# Altium PCB LCD_KB_Controller.PcbDoc (part 2 of 2)
Units mm, origin at the board's own origin, x right, y up, seen from the top; angles counter-clockwise.
Board outline 65 x 95 mm, 2 copper layers (Top Layer, Bottom Layer); 145 components, 109 nets, 476 pads, 326 vias.
Unrouted connection lines stored in the file: 275.
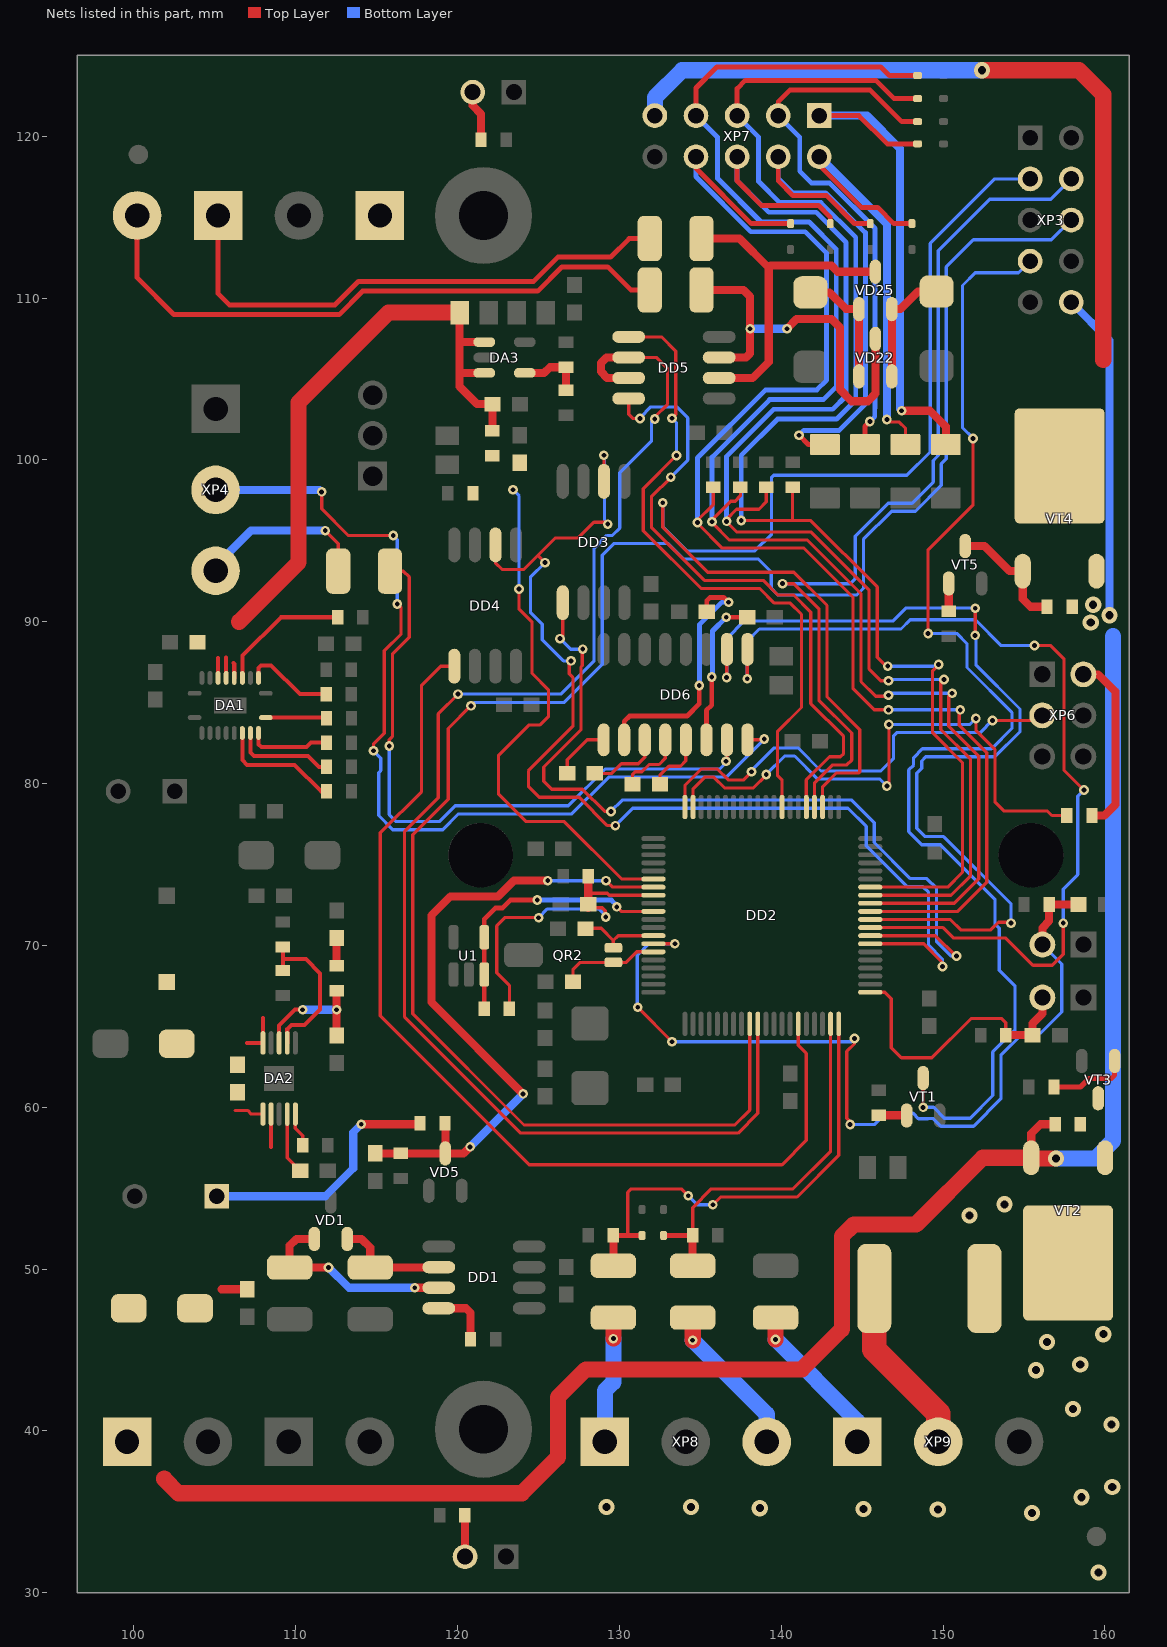
[diagram p2: the nets of this part, all layers, seen from the top]

## Via types
v1: diameter 0.6, hole 0.3, Top Layer to Bottom Layer, 301 vias
v2: diameter 1, hole 0.5, Top Layer to Bottom Layer, 25 vias

## Nets (pads, with @x,y where several pads share a name; then routed paths per layer and width w, separated by ;. In a path a pad name is that pad's centre, name@x,y a point inside that pad or via, vN(x,y) a via of type N, cw(c..) or ccw(c..) an arc to the next point about the centre after c; other vN are vias at no path point) (continued)
NetC11_2: C11.2 DD2.14 J2.2 R26.2 | length 54.5
  Top Layer w0.2: v1(131.131,66.178) 131.125,66.172 v1(133.25,64.047) ; DD2.14@132.1,70.1 v1(133.425,70.1) ; v1(144.257,58.928) 144.257,59.118 144.05,59.325 144.05,63.45 144.525,63.925 v1(144.525,64.25)
  Top Layer w0.5: J2.2@156.135,70.05 156.135,71.085 156.549,71.499 R26.2@156.549,72.525 C11.2@158.375,72.525
  Bottom Layer w0.2: v1(131.131,66.178) 131.1,66.21 131.1,69.375 131.825,70.1 v1(133.425,70.1) ; v1(133.25,64.047) 144.322,64.047 v1(144.525,64.25) ; v1(144.257,58.928) 145.749,58.928 146.446,59.625 148.142,59.625 148.476,59.291 149.056,59.291 149.065,59.3 149.393,59.3 149.868,58.825 151.882,58.825 153.575,60.518 153.575,63.211 154.95,64.586 156.036,64.586 157.335,65.885 157.335,68.85 J2.2@156.135,70.05
NetC20_2: C20.2 DD2.8 L1.2 R37.1 | length 20.3
  Top Layer w0.2: R37.1@123.2,66.075 123.2,67.525 122.425,68.3 122.425,71.2 122.95,71.725 124.985,71.725 v1(125.006,71.703) ; C20.2@128.075,72.325 128.95,72.325 129.125,72.15 129.125,71.785 v1(129.156,71.754) ; 128.075,73.275 128.125,73.225 129.25,73.225 129.375,73.1 DD2.8@132.1,73.1
  Top Layer w0.5: C20.2@128.075,72.325 C20.2@128.075,72.55 128.075,73.275 L1.2@128.075,74.099
  Bottom Layer w0.2: v1(125.006,71.703) 125.553,72.25 128.725,72.25 129.156,71.819 v1(129.156,71.754)
NetC23_1: C23.1 DA2.10 L2.1 VD21.2 | length 2.5
  Top Layer w0.25: 107,63.975 DA2.10@107.975,63.975 107.975,65.525
NetC23_2: C23.2 DA2.1 | length 1.8
  Top Layer w0.2: 106.25,59.8 107.025,59.8 107.25,59.575 DA2.1@107.975,59.575
NetC28_1: C28.1 DA2.4 | length 3.8
  Top Layer w0.2: DA2.4@109.475,59.575 109.475,56.875 C28.1@110.275,56.075
NetC29_1: C29.1 DA2.8 R31.2 | length 7.8
  Top Layer w0.25: DA2.8@108.975,63.975 108.975,65.05 109.95,66.025 v1(110.425,66.025)
  Top Layer w0.5: C29.1@112.525,64.425 v1(112.525,66.025) R31.2@112.525,67.201
  Bottom Layer w0.5: v1(110.425,66.025) v1(112.525,66.025)
NetC30_1: C30.1 R31.1 | length 1.7
  Top Layer w0.5: R31.1@112.525,68.75 C30.1@112.525,70.45
NetC36_1: C36.1 DD6.3 | length 4.6
  Top Layer w0.2: C36.1@128.475,80.625 129.525,80.625 130.125,81.225 131.175,81.225 131.565,81.615 DD6.3@131.565,82.7
NetC36_2: C36.2 DD6.1 | length 3.6
  Top Layer w0.2: C36.2@126.775,80.625 126.775,81.475 128,82.7 DD6.1@129.025,82.7
NetC37_2: C37.2 DD6.2 | length 15.7
  Top Layer w0.3: DD6.2@130.295,82.7 130.295,83.845 130.625,84.175 134.184,84.175 134.932,84.923 v1(134.932,86.054) ; C37.2@135.4,90.625 135.4,91.3 135.6,91.5 136.45,91.5 v1(136.75,91.2)
  Bottom Layer w0.3: v1(134.932,86.054) 134.957,86.079 134.957,89.832 136.325,91.2 v1(136.75,91.2)
NetC38_2: C38.2 DD6.6 | length 9.5
  Top Layer w0.3: DD6.6@135.375,82.7 135.375,84.517 135.707,84.849 v1(135.707,86.579) v1@135.786,86.5 ; v1(136.6,90.275) C38.2@137.9,90.275
  Bottom Layer w0.3: v1(135.707,86.579) 135.75,86.623 135.75,89.425 v1(136.6,90.275)
NetC39_1: C39.1 DD6.5 | length 3.8
  Top Layer w0.2: C39.1@132.5,79.95 132.5,80.518 133.057,81.075 133.775,81.075 134.105,81.405 DD6.5@134.105,82.7
NetC39_2: C39.2 DD6.4 | length 4.2
  Top Layer w0.2: C39.2@130.8,79.95 130.8,80.55 130.975,80.725 131.382,80.725 131.832,81.175 132.45,81.175 132.835,81.56 DD6.4@132.835,82.7
NetC40_2: C40.2 DD2.13 QR2.2 | length 5.1
  Top Layer w0.2: C40.2@127.85,71.075 127.871,71.054 128.871,71.054 129.625,70.3 ; QR2.2@129.625,69.85 129.625,70.3 ; DD2.13@132.1,70.6 129.925,70.6 129.625,70.3
NetC41_2: C41.2 DD2.15 QR2.1 | length 6.2
  Top Layer w0.2: C41.2@127.125,67.75 127.125,68.5 127.575,68.95 QR2.1@129.625,68.95 130.425,68.95 131.075,69.6 DD2.15@132.1,69.6
NetDA1_7: DA1.7 R2.1 | length 7.7
  Top Layer w0.25: DA1.7@106.7,83.125 106.7,81.45 107,81.15 109.925,81.15 111.55,79.525 R2.1@111.9,79.525
NetDA1_8: DA1.8 R5.1 | length 6.3
  Top Layer w0.25: DA1.8@107.2,83.125 107.2,81.925 107.425,81.7 110.75,81.7 111.425,81.025 R5.1@111.9,81.025
NetDA1_9: DA1.9 R3.1 | length 5.1
  Top Layer w0.25: DA1.9@107.7,83.125 107.7,82.425 107.875,82.25 110.675,82.25 110.95,82.525 R3.1@111.9,82.525
NetDA1_10: DA1.10 R6.1 | length 3.7
  Top Layer w0.25: DA1.10@108.15,84.075 R6.1@111.85,84.075
NetDA1_12: DA1.12 R4.1 | length 5.6
  Top Layer w0.25: DA1.12@107.7,86.525 107.7,87.15 107.85,87.3 108.475,87.3 110.25,85.525 R4.1@111.875,85.525
NetDA1_14: DA1.14 R1.1 | length 8.3
  Top Layer w0.25: DA1.14@106.7,86.525 106.7,87.9 109.075,90.275 R1.1@112.6,90.275
NetDA2_5: DA2.5 R32.2 | length 2.1
  Top Layer w0.2: DA2.5@109.975,59.575 109.975,58.7 110.426,58.249 R32.2@110.426,57.65
NetDA2_7: DA2.7 R30.1 R33.2 | length 9.7
  Top Layer w0.25: R33.2@109.2,68.449 109.2,69.15 ; R30.1@109.2,69.9 109.2,69.15 ; DA2.7@109.475,63.975 109.475,64.825 109.725,65.075 110.55,65.075 111.5,66.025 111.5,68.275 110.625,69.15 109.2,69.15
NetDA3_4: DA3.4 R34.1 R35.2 | length 4.1
  Top Layer w0.5: DA3.4@124.15,105.375 125.35,105.375 125.7,105.725 R34.1@126.7,105.725 R35.2@126.7,104.299
NetDD1_6: DD1.6 FU2.1 VD1.2 | length 7.1
  Top Layer w0.5: VD1.2@113.182,51.863 114.062,51.863 114.6,51.325 FU2.1@114.6,50.1 118.822,50.1 DD1.6@118.837,50.115
NetDD1_7: DD1.7 FU1.1 VD1.1 | length 12.8
  Top Layer w0.5: VD1.1@111.15,51.863 110.038,51.863 109.625,51.45 FU1.1@109.625,50.1 v1(112.025,50.1) ; v1(117.355,48.845) DD1.7@118.837,48.845
  Bottom Layer w0.5: v1(112.025,50.1) 113.28,48.845 v1(117.355,48.845)
NetDD1_8: DD1.8 R8.1 | length 3.7
  Top Layer w0.5: DD1.8@118.837,47.575 120.525,47.575 120.8,47.3 R8.1@120.8,45.675
NetDD2_10: DD2.10 R37.2 U1.3 U1.4 | length 16.8
  Top Layer w0.2: v1(129.831,72.379) 130.11,72.1 DD2.10@132.1,72.1
  Top Layer w0.3: R37.2@121.651,66.075 U1.3@121.65,68.2 U1.4@121.65,70.5 121.65,71.625 122.325,72.3 122.765,72.3 123.265,72.8 v1(124.925,72.8)
  Bottom Layer w0.3: v1(124.925,72.8) 129.5,72.8 129.831,72.469 v1(129.831,72.379)
NetDD5_6: DD5.6 FU9.1 VD25.3 | length 21
  Top Layer w0.5: FU9.1@135.075,113.675 137.425,113.675 139.225,111.875 ; DD5.6@136.163,105.06 138.235,105.06 139.225,106.05 139.225,111.875 ; VD25.3@145.816,111.624 143.476,111.624 143.1,112 139.35,112 139.225,111.875
NetDD5_7: DD5.7 FU8.1 VD22.3 | length 24.6
  Top Layer w0.5: FU8.1@135.075,110.5 137.675,110.5 138.075,110.1 v1(138.075,108.1) 138.075,106.575 137.83,106.33 ; DD5.7@136.163,106.33 137.775,106.33 ; v1(140.35,108.1) 140.95,108.7 143.1,108.7 143.625,108.175 143.625,104.35 144.35,103.625 145.35,103.625 145.816,104.091 VD22.3@145.816,107.474
  Bottom Layer w0.5: v1(138.075,108.1) v1(140.35,108.1)
NetFU3_1: FU3.1 XP9.1 | length 9.8
  Top Layer w1: v1(139.65,45.65) FU3.1@139.65,47
  Bottom Layer w1: v1(139.65,45.65) 144.7,40.6 XP9.1@144.7,39.325
NetFU4_1: FU4.1 XP8.3 | length 9.6
  Top Layer w1: v1(134.525,45.6) FU4.1@134.525,47
  Bottom Layer w1: v1(134.525,45.6) 139.1,41.025 XP8.3@139.1,39.325
NetFU5_1: FU5.1 XP8.1 | length 7.9
  Top Layer w1: v1(129.625,45.7) FU5.1@129.625,47
  Bottom Layer w1: XP8.1@129.1,39.325 129.1,42.475 129.625,43 v1(129.625,45.7)
NetFU6_2: FU6.2 XP4.3 | length 10.8
  Top Layer w0.2: v1(111.825,95.625) 112.625,94.825 FU6.2@112.625,93.125
  Bottom Layer w0.5: XP4.3@105.05,93.15 105.05,93.45 107.225,95.625 v1(111.825,95.625)
NetFU7_1: FU7.1 XP9.2 | length 11.1
  Top Layer w1.5: FU7.1@145.75,48.8 145.75,45.025 149.7,41.075 XP9.2@149.7,39.325
NetFU7_2: FU7.2 VT2.2
  other v2: 159.6,31.25 155.5,34.925 149.675,35.15 145.075,35.175 138.675,35.225 129.2,35.3 134.425,35.3 158.55,35.9 160.45,36.525 160.4,40.4 158.025,41.35 155.75,43.75 158.475,44.1 156.425,45.5 159.9,45.975 151.625,53.3 153.8,54
NetFU8_2: FU8.2 XP5.2 | length 38.3
  Top Layer w0.3: XP5.2@100.2,115.1 100.2,111.25 102.475,108.975 112.675,108.975 114.125,110.425 124.95,110.425 126.45,111.925 129.275,111.925 130.7,110.5 FU8.2@131.875,110.5
NetFU9_2: FU9.2 XP5.1 | length 33.5
  Top Layer w0.3: XP5.1@105.2,115.1 105.2,110.275 105.9,109.575 112.426,109.575 113.876,111.025 124.701,111.025 126.201,112.525 129.45,112.525 130.6,113.675 FU9.2@131.875,113.675
NetR10_2: R10.2 XP6.2 | length 11.1
  Top Layer w0.5: XP6.2@158.665,86.75 159.575,86.75 160.65,85.675 160.65,78.7 159.975,78.025 R10.2@159.199,78.025
NetR11_2: R11.2 VT1.1 | length 1.7
  Top Layer w0.5: R11.2@146.025,59.501 147.737,59.501 VT1.1@147.75,59.488
NetR14_1: R14.1 VT2.1 VT3.3
NetR15_2: R15.2 VT3.1 | length 4.9
  Top Layer w0.3: R15.2@156.849,61.25 158.49,61.25 159.015,61.775 160.4,61.775 160.6,61.975 VT3.1@160.6,62.862
NetR20_1: R20.1 VT4.1 VT5.3 | length 7.6
  Top Layer w0.5: VT5.3@151.366,94.674 152.551,94.674 154.1,93.125 VT4.1@154.92,93.125 154.92,91.405 155.4,90.925 R20.1@156.425,90.925
NetR21_2: R21.2 VT5.1 | length 1.7
  Top Layer w0.5: R21.2@150.35,90.649 VT5.1@150.35,92.363
NetR28_2: R28.2 VD18.2 | length 2.5
  Top Layer w0.5: VD18.2@120.449,32.236 R28.2@120.449,34.775
NetR29_2: R29.2 VD19.2 | length 3.2
  Top Layer w0.5: VD19.2@120.935,122.725 120.935,121.89 121.451,121.374 R29.2@121.451,119.775
NetVD6_1: VD6.1 VD9.2 XP7.1 | length 33.1
  Top Layer w0.3: XP7.1@142.35,121.275 144.8,121.275 146.55,119.525 VD9.2@148.425,119.525
  Top Layer w0.5: v1(147.438,103.038) 149.187,103.038 150.175,102.05 VD6.1@150.175,100.951
  Bottom Layer w0.5: XP7.1@142.35,121.275 145.3,121.275 147.325,119.25 147.325,103.15 v1(147.438,103.038)
NetVD7_1: VD7.1 VD8.2 XP7.3 | length 34.3
  Top Layer w0.3: XP7.3@139.81,121.275 139.81,122.135 140.525,122.85 145.5,122.85 147.45,120.9 VD8.2@148.425,120.9 ; VD7.1@145.175,100.951 145.175,102.075 v1(145.475,102.375)
  Bottom Layer w0.3: XP7.3@139.81,121.275 141.138,119.947 141.138,117.837 141.875,117.1 142.995,117.1 145.8,114.295 145.8,103.2 145.775,103.175 145.775,102.675 v1(145.475,102.375)
NetVD10_1: VD10.1 VD12.2 XP7.2 | length 28.1
  Top Layer w0.2: v1(146.525,102.5) 146.688,102.338 147.287,102.338 147.675,101.95 VD10.1@147.675,100.951
  Top Layer w0.3: XP7.2@142.35,118.735 142.35,118.2 144.95,115.6 145.95,115.6 146.95,114.6 VD12.2@148.075,114.6
  Bottom Layer w0.5: XP7.2@142.35,118.735 146.525,114.56 v1(146.525,102.5)
NetVD11_1: VD11.1 VD13.2 XP7.4 | length 33.7
  Top Layer w0.3: XP7.4@139.81,118.735 139.81,117.24 140.725,116.325 142.8,116.325 144.525,114.6 VD13.2@145.5,114.6 ; v1(141.1,101.525) 141.674,100.951 VD11.1@142.7,100.951
  Bottom Layer w0.3: XP7.4@139.81,118.735 139.81,117.39 140.7,116.5 142.747,116.5 145.2,114.047 145.2,103.449 143.576,101.825 141.4,101.825 v1(141.1,101.525)
NetVD22_1: VD22.1 VD23.1 VD25.1 | length 7.6
  Top Layer w0.5: VD23.1@141.8,110.35 142.975,110.35 144.012,109.313 VD25.1@144.8,109.313 VD22.1@144.8,105.163
NetVD22_2: VD22.2 VD24.2 VD25.2 | length 7.4
  Top Layer w0.5: VD22.2@146.832,105.163 VD25.2@146.832,109.313 147.363,109.313 148.45,110.4 VD24.2@149.6,110.4
NetVT1_3: VT1.3 XP3.7 | length 75.5
  Top Layer w0.2: v1(148.766,59.991) VT1.3@148.766,61.799 ; v1(149.075,89.275) 149.075,94.456 151.85,97.231 v1(151.85,101.325)
  Bottom Layer w0.2: v1(148.766,59.991) 149.409,59.991 150.075,59.325 151.675,59.325 153.075,60.725 153.075,63.418 154.45,64.793 154.45,67.482 153.475,68.457 153.475,71.068 153.2,71.343 153.2,72.85 149.825,76.225 148.682,76.225 147.875,77.032 147.875,80.843 148.175,81.143 148.175,81.6 148.725,82.15 152.997,82.15 154.25,83.403 154.25,84.397 151.475,87.172 151.475,88.65 150.85,89.275 v1(149.075,89.275) ; v1(151.85,101.325) 151.2,101.975 151.2,110.775 151.989,111.564 154.659,111.564 XP3.7@155.375,112.28
NetVT4_2: VT4.2 XP7.9 | length 46.5
  Top Layer w1: v2(152.4,124.075) 158.4,124.075 159.9,122.575 159.9,106.175
  Bottom Layer w1: XP7.9@132.19,121.275 132.19,122.39 133.875,124.075 v2(152.4,124.075)
RESET_DISP: DD2.29 XP3.6 | length 116.1
  Top Layer w0.2: v1(120.825,84.8) 119.425,83.4 119.425,79.032 117.225,76.832 117.225,65.778 124.103,58.9 137.125,58.9 138.05,59.825 DD2.29@138.05,65.15
  Bottom Layer w0.2: v1(120.825,84.8) 121.025,85 126.557,85 128.931,87.374 128.931,94.106 129.65,94.825 133.014,94.825 133.964,93.875 138.571,93.875 139.375,93.071 139.375,92.06 139.785,91.65 139.975,91.65 144.675,91.65 145.075,92.05 145.075,95.082 146.818,96.825 148.293,96.825 149.888,98.42 149.888,99.747 150.2,100.06 150.2,111.925 151.875,113.6 156.695,113.6 XP3.6@157.915,114.82
ROW1: DD2.54 R25.2 VD14.2 XP7.5 | length 88.7
  Top Layer w0.2: v1(137.525,96.25) 140.7,96.25 ; R25.2@140.7,98.301 140.7,96.25 ; DD2.54@145.5,73.6 150.282,73.6 151.2,74.518 151.2,81.282 149.35,83.132 149.35,86.975 v1(149.725,87.35) ; v1(146.582,87.254) 146.479,87.254 145.925,87.809 145.925,92.15 141.825,96.25 140.7,96.25
  Top Layer w0.3: XP7.5@137.27,121.275 137.27,122.945 137.775,123.45 145.85,123.45 146.975,122.325 VD14.2@148.425,122.325
  Bottom Layer w0.2: v1@146.678,87.35 v1(146.582,87.254) 149.629,87.254 v1(149.725,87.35)
  Bottom Layer w0.3: XP7.5@137.27,121.275 138.598,119.947 138.598,117.202 139.9,115.9 142.45,115.9 144.6,113.75 144.6,103.697 143.428,102.525 139.775,102.525 137.525,100.275 v1(137.525,96.25)
ROW2: DD2.53 R24.2 VD15.2 XP7.6 | length 84.9
  Top Layer w0.2: R24.2@139.075,98.301 139.075,97.4 138.625,96.95 137.235,96.95 136.625,96.34 v1(136.625,96.2) 136.625,96.16 137.235,95.55 141.818,95.55 145.425,91.943 145.425,87.075 146.15,86.35 146.628,86.35 v1(146.632,86.354) ; DD2.53@145.5,73.1 150.489,73.1 151.7,74.311 151.7,81.489 149.85,83.339 149.85,86.35 149.929,86.429 v1(150.057,86.429)
  Top Layer w0.3: XP7.6@137.27,118.735 137.27,117.23 138.775,115.725 142.3,115.725 143.025,115 VD15.2@143.025,114.6
  Bottom Layer w0.2: v1(146.632,86.354) 146.707,86.429 v1(150.057,86.429)
  Bottom Layer w0.3: v1(136.625,96.2) 136.625,100.224 139.526,103.125 143.179,103.125 144,103.946 144,113.45 142.15,115.3 139.225,115.3 137.27,117.255 XP7.6@137.27,118.735
ROW3: DD2.52 R23.2 VD16.2 XP7.7 | length 97
  Top Layer w0.2: R23.2@137.475,98.301 137.475,97.775 137.15,97.45 136.885,97.45 135.725,96.29 v1(135.725,96.175) 135.725,96.11 136.785,95.05 141.611,95.05 144.925,91.736 144.925,86.3 145.828,85.397 146.575,85.397 v1(146.632,85.454) ; DD2.52@145.5,72.6 150.696,72.6 152.2,74.104 152.2,81.696 150.35,83.546 150.35,85.4 150.529,85.579 v1(150.557,85.579)
  Top Layer w0.3: XP7.7@134.73,121.275 134.73,122.98 136.025,124.275 146.15,124.275 146.675,123.75 VD16.2@148.425,123.75
  Bottom Layer w0.2: v1(146.632,85.454) 146.757,85.579 v1(150.557,85.579)
  Bottom Layer w0.3: XP7.7@134.73,121.275 136.058,119.947 136.058,117.392 138.75,114.7 141.725,114.7 143.4,113.025 143.4,104.525 142.6,103.725 139.278,103.725 135.725,100.172 v1(135.725,96.175)
ROW4: DD2.51 R22.2 VD17.2 XP7.8 | length 86.6
  Top Layer w0.2: R22.2@135.8,98.301 135.8,97.24 134.825,96.265 v1(134.825,96.125) 134.825,96.085 136.36,94.55 141.403,94.55 144.425,91.528 144.425,85.875 145.746,84.554 v1(146.632,84.554) ; DD2.51@145.5,72.1 150.903,72.1 152.7,73.897 152.7,81.903 151,83.603 151,84.497 v1(151.057,84.554)
  Top Layer w0.3: XP7.8@134.73,118.02 138.15,114.6 VD17.2@140.575,114.6
  Bottom Layer w0.2: v1(146.632,84.554) v1(151.057,84.554)
  Bottom Layer w0.3: XP7.8@134.73,118.735 134.73,117.495 138.125,114.1 141.476,114.1 142.8,112.776 142.8,104.925 142.2,104.325 139.029,104.325 134.825,100.121 v1(134.825,96.125)
RS_DIR: DD2.30 DD5.2 DD5.3 | length 88.5
  Top Layer w0.2: v1(120.025,85.525) 118.8,84.3 118.8,79.114 116.725,77.039 116.725,65.571 123.896,58.4 137.332,58.4 138.55,59.618 DD2.30@138.55,65.15 ; DD5.2@130.575,106.33 132.27,106.33 132.975,105.625 132.975,103.45 132.175,102.65 132.175,102.536 v1(132.181,102.53)
  Top Layer w0.5: DD5.3@130.575,105.06 129.24,105.06 128.85,105.45 128.85,105.975 129.205,106.33 DD5.2@130.575,106.33
  Bottom Layer w0.2: v1(120.025,85.525) 126.375,85.525 128.431,87.581 128.431,94.531 129.23,95.33 129.571,95.33 130.025,95.783 130.025,99.2 131.975,101.15 131.975,102.324 v1(132.181,102.53)
RS_RXD: DD2.68 DD5.1 | length 40
  Top Layer w0.2: DD5.1@130.575,107.6 132.6,107.6 133.475,106.725 133.475,102.8 v1(133.25,102.575) ; v1(133.525,100.275) 131.475,98.225 131.475,95.622 135.047,92.05 138.678,92.05 139.578,91.15 140.55,91.15 141.25,90.45 141.25,88.925 141.25,84.7 139.775,83.225 139.775,80.475 140.05,80.2 DD2.68@140.05,78.55
  Bottom Layer w0.2: v1(133.25,102.575) 133.525,102.3 v1(133.525,100.275)
RS_TXD: DD2.65 DD5.4 | length 39.3
  Top Layer w0.2: DD5.4@130.575,103.79 130.575,102.825 130.85,102.55 v1(131.275,102.55) ; v1(133.175,98.935) 133.19,98.935 131.975,97.72 131.975,95.829 135.254,92.55 138.885,92.55 139.785,91.65 140.768,91.65 141.825,90.593 141.825,84.939 143.85,82.914 143.85,81.85 143.65,81.65 142.979,81.65 141.55,80.221 DD2.65@141.55,78.55
  Bottom Layer w0.2: v1(131.275,102.55) 131.275,102.614 131.936,103.275 133.54,103.275 134.225,102.59 134.225,99.985 v1(133.175,98.935)
RX232: DD2.49 DD6.9 | length 57.7
  Top Layer w0.2: v1(137.9,86.475) 137.9,88.273 DD6.9@137.915,88.288 ; DD2.49@145.5,71.1 150,71.1 150.647,70.453 153.872,70.453 155.55,68.775 156.75,68.775 157.425,69.45 v1(157.425,71.375) ; v1(155.65,88.525) 156.65,88.525 157.465,87.71 157.465,80.835 v1(158.7,79.6)
  Bottom Layer w0.2: v1(137.9,86.475) 137.9,88.8 138.65,89.55 147.4,89.55 147.975,90.125 152,90.125 153.6,88.525 v1(155.65,88.525) ; v1(157.425,71.375) 157.425,73.474 158.325,74.374 158.325,79.225 v1(158.7,79.6)
RXD: DD6.8 XP4.2 | length 58.7
  Top Layer w0.2: v1(111.6,98.025) 111.6,96.975 113.25,95.325 v1(116.025,95.325) ; v1(114.8,82.025) 114.8,82.432 115.475,83.107 115.475,88.209 116.506,89.24 116.506,90.869 v1(116.275,91.1) ; DD6.8@137.915,82.7 v1@138.9,82.7
  Bottom Layer w0.2: v1(114.8,82.025) 115.25,81.575 115.25,80.8 115.125,80.675 115.125,78.025 116,77.15 119.082,77.15 120.057,78.125 127.056,78.125 129.331,80.4 136.6,80.4 v1(138.95,82.75) ; v1(116.025,95.325) 116.275,95.075 v1(116.275,91.1)
  Bottom Layer w0.5: XP4.2@105.05,98.15 111.475,98.15 v1(111.6,98.025)
RXD0: DD2.80 XP6.3 | length 27.9
  Top Layer w0.2: DD2.80@134.05,78.55 134.05,79.897 135.053,80.9 136.047,80.9 136.722,80.225 137.675,80.225 138.157,80.707 v1(138.157,80.729) ; v1(153.05,83.9) 155.815,83.9 XP6.3@156.125,84.21
  Bottom Layer w0.2: v1(138.157,80.729) 138.092,80.729 139.563,82.2 141.032,82.2 142.457,80.775 146.15,80.775 146.94,81.565 146.94,82.95 147.14,83.15 152.3,83.15 v1(153.05,83.9)
SCK: DD2.47 DD3.6 DD4.6 | length 72.1
  Top Layer w0.2: DD4.6@122.34,94.743 122.34,93.635 122.75,93.225 124.1,93.225 124.937,94.062 ; v1(125.4,93.65) 124.988,94.062 124.937,94.062 ; v1(127.006,87.579) 126.904,87.579 126.904,86.778 127.125,86.557 127.125,83.529 124.375,80.779 124.375,79.825 125.05,79.15 127.507,79.15 129.257,77.4 v1(129.75,77.4) ; v1@129.025,100.348 129.04,100.333 v1(129.04,100.283) DD3.6@129.04,98.668 ; v1(129.281,96.03) 129.161,96.15 128.424,96.15 127.449,95.175 126.05,95.175 124.937,94.062 ; DD2.47@145.5,70.1 148.8,70.1 149.96,68.94 v1(149.96,68.7)
  Bottom Layer w0.2: v1(125.4,93.65) 124.5,92.75 124.5,90.575 125.231,89.844 125.231,88.889 126.541,87.579 v1(127.006,87.579) ; v1(129.04,100.283) 129.075,100.248 129.075,96.236 v1(129.281,96.03) ; v1(129.75,77.4) 130.825,78.475 144.125,78.475 145.25,77.35 145.25,76.15 147.775,73.625 148.75,73.625 149.1,73.275 149.1,70.018 149.96,69.158 v1(149.96,68.7)
SCK_DISPLAY: DD2.63 XP3.3 | length 72.7
  Top Layer w0.2: v1(132.675,97.35) 132.675,95.836 135.461,93.05 140.782,93.05 142.825,91.007 142.825,85.354 144.85,83.329 144.85,80.707 144.793,80.65 143.393,80.65 142.55,79.807 DD2.63@142.55,78.55
  Bottom Layer w0.2: v1(132.675,97.35) 132.675,95.871 134.171,94.375 138.364,94.375 139.4,95.411 139.4,98.925 139.525,99.05 147.764,99.05 149.2,100.486 149.2,113.375 153.185,117.36 XP3.3@155.375,117.36
SCL: DD2.40 FU5.2 R18.1 VD3.2 | length 29.2
  Top Layer w0.2: 130.512,52.075 130.512,54.738 130.725,54.95 133.825,54.95 v1(134.25,54.525) ; v1(135.775,53.975) 136.25,54.45 140.975,54.45 143.55,57.025 DD2.40@143.55,65.15
  Top Layer w0.3: R18.1@129.625,52.075 130.512,52.075 VD3.2@131.4,52.075
  Top Layer w0.5: FU5.2@129.625,50.2 R18.1@129.625,52.075
  Bottom Layer w0.2: v1(134.25,54.525) 134.8,53.975 v1(135.775,53.975)
SDA: DD2.39 FU4.2 R17.1 VD4.2 | length 23.2
  Top Layer w0.2: R17.1@134.525,52.075 134.525,53.8 135.675,54.95 140.725,54.95 143.05,57.275 DD2.39@143.05,65.15
  Top Layer w0.3: VD4.2@132.725,52.075 R17.1@134.525,52.075
  Top Layer w0.5: FU4.2@134.525,50.2 R17.1@134.525,52.075
SS0: DD2.48 DD3.1 | length 52.2
  Top Layer w0.2: v1(126.331,88.954) 126.5,89.123 DD3.1@126.5,91.175 ; v1@127.795,88.241 v1(127.731,88.304) 127.706,88.279 127.706,87.289 127.625,87.208 127.625,83.322 125.327,81.023 125.327,80.148 125.825,79.65 127.714,79.65 129.089,78.275 v1(129.475,78.275) ; DD2.48@145.5,70.6 149.525,70.6 150.775,69.35 v1(150.825,69.35)
  Bottom Layer w0.2: v1(126.331,88.954) 126.346,88.954 126.996,88.304 v1(127.731,88.304) ; v1(129.475,78.275) 130.175,78.975 144.35,78.975 145.75,77.575 145.75,76.357 147.982,74.125 149,74.125 149.6,73.525 149.6,70.225 150.475,69.35 v1(150.825,69.35)
SS1: DD2.35 DD4.1 | length 62.2
  Top Layer w0.2: DD4.1@119.8,87.25 118.95,87.25 117.775,86.075 117.775,79.503 115.225,76.953 115.225,65.657 124.432,56.45 140.05,56.45 141.55,57.95 141.55,63.325 141.05,63.825 DD2.35@141.05,65.15
SS_DISPLAY: DD2.64 XP3.4 | length 55.4
  Top Layer w0.2: v1(140.075,92.35) 140.775,92.35 142.325,90.8 142.325,85.147 144.35,83.122 144.35,81.45 144.05,81.15 143.186,81.15 142.05,80.014 DD2.64@142.05,78.55
  Bottom Layer w0.2: v1(140.075,92.35) 144.275,92.35 144.575,92.65 144.575,95.289 146.611,97.325 148.086,97.325 149.388,98.627 149.388,99.955 149.561,100.128 149.561,100.139 149.7,100.279 149.7,112.925 152.875,116.1 156.655,116.1 XP3.4@157.915,117.36
TST: C12.2 DD2.41 J1.2 R27.2 | length 17.9
  Top Layer w0.2: DD2.41@145.5,67.1 146.4,67.1 146.8,66.7 146.8,63.675 147.425,63.05 149.3,63.05 151.725,65.475 153.625,65.475 153.874,65.226 R27.2@153.874,64.45
  Top Layer w0.5: R27.2@153.874,64.45 C12.2@155.525,64.45 155.525,65.175 156.135,65.785 J1.2@156.135,66.775
TX232: DD2.50 DD6.10 | length 58.4
  Top Layer w0.2: v1(136.625,86.55) 136.625,88.268 DD6.10@136.645,88.288 ; DD2.50@145.5,71.6 150.45,71.6 151.097,70.953 152.953,70.953 153.425,71.425 154.15,71.425 v1(154.2,71.375) ; v1(151.98,89.155) 151.98,90.827 v1(151.982,90.829)
  Bottom Layer w0.2: v1(136.625,86.55) 136.625,88.95 137.725,90.05 146.925,90.05 147.725,90.85 151.757,90.85 v1@151.982,90.625 ; v1(151.98,89.155) 152.025,89.11 152.025,87.329 154.75,84.604 154.75,83.196 153.204,81.65 148.932,81.65 148.675,81.393 148.675,80.936 148.375,80.636 148.375,77.239 148.889,76.725 150.032,76.725 154.2,72.557 v1(154.2,71.375) ; v1(151.982,90.829) v1@152.011,90.829
TXD: DD6.7 FU6.1 | length 40.5
  Top Layer w0.2: v1(115.775,82.325) 115.775,82.7 115.975,82.9 115.975,88.002 117.006,89.033 117.006,92.769 116.65,93.125 FU6.1@115.825,93.125 ; v1(136.582,81.379) 136.645,81.442 DD6.7@136.645,82.7
  Bottom Layer w0.2: v1(115.775,82.325) 115.775,78.082 116.207,77.65 118.875,77.65 119.85,78.625 126.849,78.625 129.124,80.9 136.189,80.9 136.625,81.336 v1(136.582,81.379)
TXD0: DD2.79 R10.1 | length 35.1
  Top Layer w0.2: DD2.79@134.55,78.55 134.55,79.69 135.26,80.4 135.84,80.4 136.515,79.725 138.275,79.725 139.075,80.525 v1(139.075,80.565) ; v1(146.525,79.85) 146.65,79.975 v1(146.65,83.65) ; v1(152.025,84.025) 152.025,83.286 153.2,82.111 153.2,78.875 153.775,78.3 156.45,78.3 156.725,78.025 R10.1@157.65,78.025
  Bottom Layer w0.2: v1(139.075,80.565) 140.21,81.7 140.825,81.7 142.25,80.275 146.1,80.275 v1(146.525,79.85) ; v1(146.65,83.65) 151.65,83.65 v1(152.025,84.025)
V_SYSTEM: C8.2 DD2.6 R16.1 R19.2 | length 33.1
  Top Layer w0.2: v1(123.8,92.025) 123.8,90.775 124.6,89.975 124.6,86.8 125.625,85.775 125.625,84.15 125.1,83.625 124.425,83.625 122.525,81.725 122.525,79.369 124.244,77.65 126.594,77.65 130.144,74.1 DD2.6@132.1,74.1
  Bottom Layer w0.2: v1(123.425,98.15) 123.8,97.775 v1(123.8,92.025)
V_VIN: C7.2 DD2.7 R12.2 R13.2 VD5.3 | length 40.7
  Top Layer w0.2: v1(129.175,74) 129.45,73.725 129.457,73.725 129.582,73.6 DD2.7@132.1,73.6
  Top Layer w0.5: C7.2@114.9,57.15 R13.2@116.5,57.149 VD5.3@119.241,57.149 ; R12.2@119.224,59 119.241,58.983 VD5.3@119.241,57.149 120.374,57.149 v1(120.775,57.55) ; v1(124.05,60.825) 118.375,66.5 118.375,71.85 119.55,73.025 122.5,73.025 123.475,74 v1(125.575,74)
  Bottom Layer w0.2: v1(125.575,74) v1(129.175,74)
  Bottom Layer w0.5: v1(120.775,57.55) v1(124.05,60.825)
VBAT: C3.2 C33.2 C34.1 DA1.15 DA1.16 DA1.17 DA3.1 DA3.3 R16.2 | length 42.3
  Top Layer w0.25: DA1.17@105.2,86.525 105.2,87.75 ; DA1.16@105.7,86.525 105.7,87.775 ; 106.15,87.45 106.2,87.4 DA1.15@106.2,86.525
  Top Layer w0.5: C33.2@120.125,109.1 120.125,104.525 121.2,103.45 C34.1@122.15,103.45 R16.2@122.15,101.799 ; 120.15,107.275 DA3.1@121.65,107.275 ; 120.325,105.375 DA3.3@121.65,105.375
  Top Layer w1: 106.5,90 110.175,93.675 110.175,103.55 115.725,109.1 C33.2@120.125,109.1
VIN: R14.2 R20.2 VD20.1 VT2.3 VT4.3 XP2.1 XP3.10 XP10.1 | length 128.3
  Top Layer w0.5: VT2.3@155.445,56.875 155.445,58.37 156.025,58.95 R14.2@156.926,58.95
  Top Layer w1: 101.875,37.05 101.875,37.025 102.75,36.15 123.975,36.15 126.2,38.375 126.2,42.075 127.925,43.8 141.275,43.8 143.75,46.275 143.75,52.025 144.475,52.75 148.325,52.75 152.45,56.875 VT2.3@155.445,56.875 155.495,56.825 v2(156.975,56.825)
  Bottom Layer w0.5: XP3.10@157.915,109.74 160.275,107.38 v2(160.275,90.4)
  Bottom Layer w1: v2(156.975,56.825) 159.4,56.825 160.5,57.925 160.5,89.1
  other v2: 159.125,89.95 159.275,91.05
VIN_F: C26.2 C27.1 DA2.2 R12.1 VD20.2 | length 19.3
  Top Layer w0.25: 108.475,57.55 DA2.2@108.475,59.575
  Top Layer w0.5: 105.4,48.75 C27.1@107,48.75 ; v1(114.05,58.95) 117.625,58.95 R12.1@117.675,59
  Bottom Layer w0.5: C26.2@105.125,54.5 111.825,54.5 113.55,56.225 113.55,58.45 v1(114.05,58.95)
pads on no net: DA1.2 DA1.3 DA1.18 DA2.3 DA2.6 DD2.1 DD2.2 DD2.3 DD2.4 DD2.5 DD2.11 DD2.16 DD2.17 DD2.18 DD2.22 DD2.23 DD2.36 DD2.69 DD2.70 DD2.71 DD2.72 DD2.73 DD2.74 DD2.75 DD2.76 DD6.11 DD6.12 DD6.13 DD6.14 REPER1.1 REPER2.1 U1.1 U1.2 XP1.3 XP6.1 XP6.4 XP6.6

## Polygon pours and split planes (outlines as drawn)
V_SYSTEM on Top Layer "NONET_L01_P036" (hatched 90Degree grid 0.15 track 0.2, remove dead copper, shelved, pour order 36): 120.375,98.075 120.375,100.35 120.8,100.775 121.025,101 122.075,101 122.8,101 123,100.8 123.25,100.55 124.025,100.55 124.525,100.55 124.7,100.375 124.775,100.3 124.775,99.325 124.775,98.95 124.15,98.325 122.85,97.025 121.575,97.025 120.525,97.025 120.375,97.175
NetVT4_2 on Top Layer "NONET_L01_P030" (hatched 90Degree grid 0.15 track 0.2, remove dead copper, shelved, pour order 30): 155.6,95.875 161.5,95.875 161.5,106.925 154.15,106.925 153.175,105.95 151.675,104.45 151.675,102.025 151.675,96.575 152.375,95.875
VIN on Top Layer "NONET_L01_P026" (hatched 90Degree grid 0.15 track 0.2, remove dead copper, shelved, pour order 26): 157.5,90.85 157.5,93.825 157.9,94.225 158.1,94.425 159.6,94.425 161.5,94.425 161.5,90.725 161.5,90.225 161.05,89.775 160.75,89.475 159.725,89.475 157.975,89.475 157.85,89.6 157.5,89.95 157.5,90.05
NetR14_1 on Top Layer "NONET_L01_P024" (hatched 90Degree grid 0.15 track 0.2, remove dead copper, shelved, pour order 24): 157.8,58.95 157.8,60.25 157.8,60.35 158.2,60.75 158.75,61.3 159.975,61.3 161.5,61.3 161.5,57.275 161.5,56.25 161,55.75 160.725,55.475 159.375,55.475 158.425,55.475 157.975,55.925 157.8,56.1 157.8,56.75
NetFU7_2 on Top Layer "NONET_L01_P020" (hatched 90Degree grid 0.15 track 0.2, remove dead copper, shelved, pour order 20): 160.075,43.425 161.5,43.425 161.5,30 141.6,30 126.15,30 126.15,35.95 126.55,36.35 126.8,36.6 130.575,36.6 155.75,36.6 156.5,37.35 156.75,37.6 156.75,43.425
NetFU7_2 on Top Layer "NONET_L01_P016" (hatched 90Degree grid 0.15 track 0.2, remove dead copper, shelved, pour order 16): 154.75,54.75 161.5,54.75 161.5,52.125 161.5,44.775 161.5,44 161.5,42.375 159.875,42.375 157.025,42.375 151.675,42.375 150.6,43.45 150.525,43.525 150.525,50.475 150.525,54.025 151.25,54.75
VBAT on Top Layer "NONET_L01_P014" (hatched 90Degree grid 0.15 track 0.2, remove dead copper, shelved, pour order 14): 104.875,87.375 104.575,87.375 103.775,87.375 103.45,87.7 103.15,88 103.15,88.95 103.15,89.625 103.65,90.125 103.875,90.35 106.3,90.35 106.725,90.35 107.075,90 107.125,89.95 107.125,89.25 107.125,89 106.6,88.475 106.3,88.175 106.3,87.775 106.3,87.6 106.075,87.375
NetC23_1 on Top Layer "NONET_L01_P008" (hatched 90Degree grid 0.15 track 0.2, remove dead copper, shelved, pour order 8): 102.5,61.7 102.5,62.975 102.5,63.3 102.175,63.625 102.1,63.7 101.475,63.7 100.95,63.7 99.375,65.275 99.125,65.525 99.125,67.25 101.325,67.25 107.5,67.25 107.75,67.25 107.95,67.05 108.15,66.85 108.15,65.85 108.15,65.575 107.925,65.35 107.3,64.725 107.3,63.7 107.3,61.15 107.05,60.9 106.825,60.675 106.425,60.675 105.55,60.675 105.15,60.275 105,60.125 104.2,60.125 102.85,60.125 102.5,60.475
VIN_F on Top Layer "NONET_L01_P006" (hatched 90Degree grid 0.15 track 0.2, remove dead copper, shelved, pour order 6): 102.3,47.375 102.3,49.45 102.95,50.1 103.975,51.125 103.975,55.175 103.975,56.95 104.625,57.6 105.2,58.175 106.75,58.175 108.5,58.175 108.8,57.875 109,57.675 109,56.775 109,52.925 107.525,51.45 105.675,49.6 105.675,46.725 105.675,46.55 105.3,46.175 104.875,45.75 103.375,45.75 102.925,45.75 102.3,46.375
VIN on Top Layer "NONET_L01_P002" (hatched 90Degree grid 0.15 track 0.2, remove dead copper, shelved, pour order 2): 96.5,37 101.275,37 101.825,37 102.2,37.375 102.2,41.225 102.2,45.575 101.775,46 101.425,46.35 101.425,48.125 101.425,48.75 100.725,49.45 98.125,52.05 98.125,55.675 98.125,60.125 98.125,63.725 98.125,76.475 98.1,76.5 98.1,92.6 98.1,120.225 98.075,120.25 99.225,121.4 100.175,121.4 111.85,121.4 112.625,120.625 112.625,118.4 112.625,112.8 113.125,112.3 113.35,112.075 115.35,112.075 116.95,112.075 117.725,112.85 117.75,112.875 117.75,115.025 117.75,125 96.5,125
GND on Top Layer "NONET_L01_P044" (hatched 90Degree grid 0.15 track 0.2, remove dead copper, shelved, pour order 44): 96.5,125 161.5,125 161.5,30 96.5,30
+5V on Top Layer "NONET_L01_P040" (hatched 90Degree grid 0.15 track 0.2, remove dead copper, shelved, pour order 40): 101.275,69.725 101.273,69.727 100.101,69.727 99.623,69.727 99.2,70.15 99.2,71.525 99.2,73.7 100.375,74.875 101.825,76.325 101.825,77.925 101.825,79.85 102.05,80.075 103.425,80.075 104.175,80.075 104.45,79.8 104.85,79.4 104.85,78.45 104.85,77.15 105.425,76.575 107.125,76.575 108.625,76.575 108.925,76.275 109.075,76.125 109.075,74.825 109.075,74.425 108.7,74.05 108.35,73.7 108.35,72.75 108.35,70.15 107.925,69.725
VIN on Bottom Layer "NONET_L02_P028" (hatched 90Degree grid 0.15 track 0.2, remove dead copper, shelved, pour order 28): 158.175,92.025 161.5,92.025 161.5,89.625 161.5,89.45 161.075,89.025 160.7,88.65 159.975,88.65 158.5,88.65 158.35,88.8 158.175,88.975 158.175,91.025
NetFU7_2 on Bottom Layer "NONET_L02_P022" (hatched 90Degree grid 0.15 track 0.2, remove dead copper, shelved, pour order 22): 156.75,42.275 156.75,37.6 155.75,36.6 126.8,36.6 126.775,36.6 126.1,35.925 126.1,30 161.5,30 161.525,30.025 161.525,44.775 157.175,44.775 156.75,44.35
NetFU7_2 on Bottom Layer "NONET_L02_P018" (hatched 90Degree grid 0.15 track 0.2, remove dead copper, shelved, pour order 18): 161.5,54.85 154.5,54.85 151.275,54.85 150.475,54.05 150.425,54 150.425,46.525 153.15,43.8 153.3,43.8 154.85,43.8 156.75,42.275 161.5,42.275
GND on Bottom Layer "NONET_L02_P046" (hatched 90Degree grid 0.15 track 0.2, remove dead copper, shelved, pour order 46): 96.5,125 161.5,125 161.5,30 96.5,30

## Keep-outs
Keep-Out Layer:
  the board outline again, w0.2

## Other copper
Top Layer:
  pour cut-out: 128.375,47.85 128.375,49.375 130.875,49.375 130.875,47.85
  pour cut-out: 133.3,47.85 133.3,49.375 135.8,49.375 135.8,47.85
  pour cut-out: 138.425,47.875 138.425,49.4 140.925,49.4 140.925,47.875
  pour cut-out: 108.4,47.725 108.4,49.25 110.9,49.25 110.9,47.725
  pour cut-out: 113.325,47.75 113.325,49.275 115.825,49.275 115.825,47.75
  pour cut-out: 134.225,112.45 132.7,112.45 132.7,114.95 134.225,114.95
  pour cut-out: 134.25,109.275 132.725,109.275 132.725,111.775 134.25,111.775
  pour cut-out: 103.163,85.925 104.338,85.925 104.313,85.9 104.313,85.25 103.163,85.25
  pour cut-out: 107.563,85.925 108.75,85.925 108.75,85.75 108.75,85.25 107.563,85.25
  pour cut-out: 147,51.375 151.375,51.375 151.375,46.25 147,46.25
  pour cut-out: 114.925,91.85 113.4,91.85 113.4,94.35 114.925,94.35

## Silkscreen, mask and mechanical layers (free items; w line width, h text height)
Top Overlay:
  lines w0.2: 96.75,100.55 98.775,100.55 ; 96.775,95.55 98.75,95.55 ; 97.075,33.025 97.075,30.375 117.675,30.375 117.675,33.025 ; 97.1,121.4 97.1,124.625 112.6,124.625 ; 98.75,90.05 96.75,90.05 96.75,106.25 98.75,106.25 ; 102.175,30.375 102.175,33.05 ; 102.6,121.375 102.6,124.65 ; 105.625,75.825 106.725,75.825 ; 106.175,75.25 106.175,76.375 ; 106.575,58.65 107.15,58.075 107.55,58.075 ; 107,49.875 107,50.55 107.45,51 ; 107.075,30.375 107.075,33.025 ; 107.7,121.4 107.7,124.625 ; 110.375,73 111.025,73 111.8,73.775 112.55,73.775 ; 112.175,30.375 112.175,33.05 ; 112.6,121.375 112.6,124.625 ; 117.7,121.4 117.7,124.625 112.6,124.625 ; 126,33.025 126,30.375 ; 131.7,30.375 131.7,33.05 ; 136.7,30.375 136.7,33.025 ; 141.6,30.375 141.6,33.025 ; 147.3,30.375 147.3,33.05 ; 152.3,30.4 152.3,33.025 ; 157.8,33.025 157.8,30.375 ; 126,30.375 157.8,30.375 ; 126,30.375 126,30.375 ; 157.8,30.375 157.8,30.375
  text "A" at 105.475,124.35 h0.8 r180
  text "B" at 100.275,124.225 h0.8 r180
  text "485" at 126.8,123.15 h0.8 r180
  text "GND" at 111.45,122.85 h0.8 r180
  text "VIN" at 116.4,122.85 h0.8 r180
  text "RS485" at 102.05,122.7 h0.8 r180
  text "RS485" at 107.125,122.7 h0.8 r180
  text "KEYBOARD" at 126.65,115.55 h0.8 r90
  text "RS-485" at 111.15,108.425 h1.4 r180
  text "BATTERY" at 112.8,106.85 h0.8
  text "GND" at 97.325,104.35 h0.8 r270
  text "GRAPHIC DISPLAY" at 149.55,103.5 h0.8
  text "RS-232" at 111.55,102.175 h1 r270
  text "RXD" at 97.325,99.3 h0.8 r270
  text "TXD" at 97.325,93.925 h0.8 r270
  text "LCD-KB BOARD" at 117.025,62.675 h1 r90
  text "STATE" at 121.65,34.225 h0.8
  text "VIN" at 98.15,31.375 h0.8
  text "GND" at 103.3,31.375 h0.8
  text "CANH" at 108.025,31.375 h0.8
  text "CANL" at 113.45,31.375 h0.8
  text "SCL" at 127.1,30.875 h0.8
  text "GND" at 132.2,30.875 h0.8
  text "SDA" at 137.25,30.875 h0.8
  text "VCC" at 143.775,30.875 h0.8
  text "BL" at 148.8,30.875 h0.8
  text "GND" at 153.1,30.875 h0.8